# EAGLE board Solar_Points (EAGLE 9.6.2)
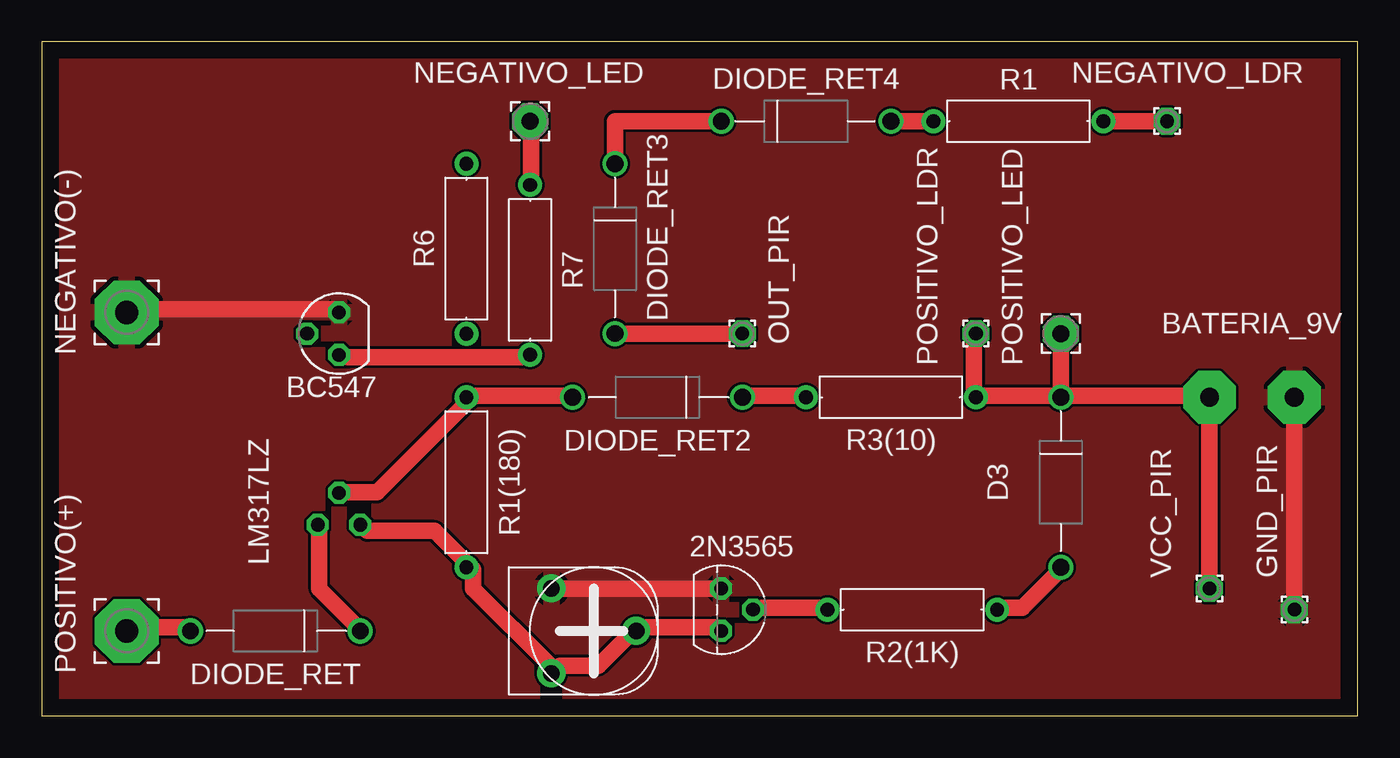
[diagram p0: board, top side]
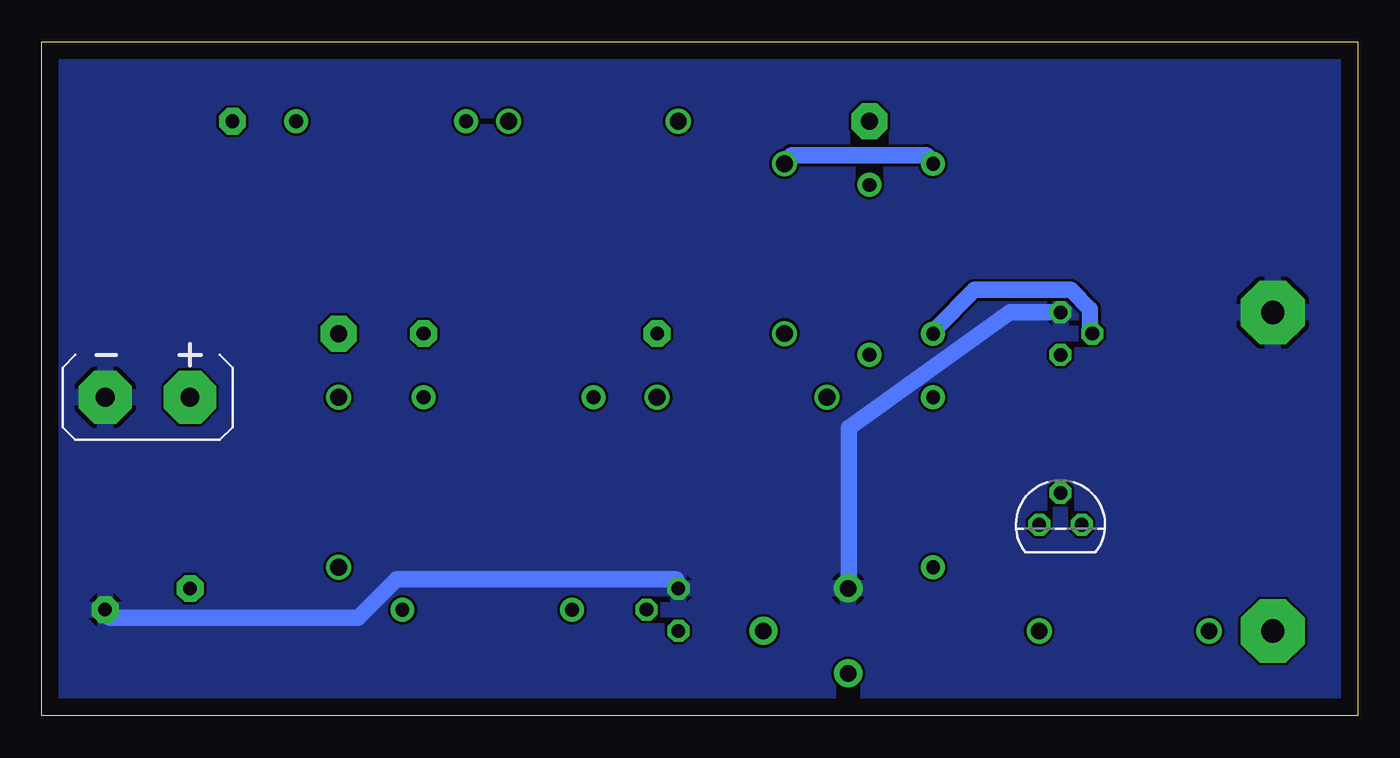
[diagram p1: board, bottom side, seen from below]

Size 78.72 x 40.31 mm. Coordinates in mm from the lower left corner, seen from the top.
Outline: 0,0 78.72,0 78.72,40.31 0,40.31 0,0
Copper layers (1*16): Top 0.035mm / dielectric 1.5mm / Bottom 0.035mm
Design rules "default *": minimum track width 1mm, minimum drill 0.35mm, track to track 6mil, track to pad 6mil, pad to pad 6mil, via to via 6mil, smd to smd 6mil, copper to edge 40mil, drill to drill 6mil, minimum pad ring 10mil, minimum via ring 8mil, stop-mask expansion 4mm, vias tented up to drill 0mil, thermal gap 10mil

## Footprints (pad centres in the part's own frame; a part is rotated, then mirrored left to right if it is on the bottom)
TO92 = drill 0.813 octagon: 1 1.27,0; 2 0,1.905; 3 -1.27,0
BATTERY-GENERIC = drill 1.118 pad 3.15 octagon: + 2.54,0; - -2.54,0
SOT54A = drill 0.813 octagon: B 0,1.905; C -1.27,0; E 1.27,0
DIODE-AXIAL = drill 1: 1 -5.08,0; 2 5.08,0
1,6/0,8 = drill 0.813 pad 1.6 octagon: 1 0,0
TO92' = drill 0.813 octagon: 1 -1.27,0; 2 0,1.905; 3 1.27,0
3,81/1,4 = drill 1.397 pad 3.81 octagon: 1 0,0
2,15/1,0 = drill 1.016 pad 2.159 octagon: 1 0,0
HA-06-SM065 = drill 1 pad 1.676: 1 -2.54,-2.54; 2 0,2.54; 3 2.54,-2.54
RESAD1016W63L850D250B = drill 0.83 pad 1.43: 1 -5.08,0; 2 5.08,0

## Placement (x,y rotation side)
2N3565  [TO92]  40.64,6.35 270 top
BATERIA_9V  [BATTERY-GENERIC]  72.39,19.05 0 bottom
BC547  [SOT54A]  17.78,22.86 90 top
D3  DIODE_ZENER  [DIODE-AXIAL]  60.96,13.97 90 top
DIODE_RET  [DIODE-AXIAL]  13.97,5.08 0 top
DIODE_RET2  [DIODE-AXIAL]  36.83,19.05 0 top
DIODE_RET3  [DIODE-AXIAL]  34.29,27.94 90 top
DIODE_RET4  [DIODE-AXIAL]  45.72,35.56 180 top
GND_PIR  [1,6/0,8]  74.93,6.35 0 top
LM317LZ  [TO92']  17.78,11.43 0 bottom
NEGATIVO(-)  [3,81/1,4]  5.08,24.13 0 top
NEGATIVO_LDR  [1,6/0,8]  67.31,35.56 0 top
NEGATIVO_LED  [2,15/1,0]  29.21,35.56 0 top
OUT_PIR  [1,6/0,8]  41.91,22.86 0 top
POSITIVO(+)  [3,81/1,4]  5.08,5.08 90 top
POSITIVO_LDR  [1,6/0,8]  55.88,22.86 0 top
POSITIVO_LED  [2,15/1,0]  60.96,22.86 0 top
POT(2K)  [HA-06-SM065]  33.02,5.08 270 top
R1  [RESAD1016W63L850D250B]  58.42,35.56 180 top
R1(180)  [RESAD1016W63L850D250B]  25.4,13.97 90 top
R2(1K)  [RESAD1016W63L850D250B]  52.07,6.35 180 top
R3(10)  [RESAD1016W63L850D250B]  50.8,19.05 180 top
R6  [RESAD1016W63L850D250B]  25.4,27.94 270 top
R7  [RESAD1016W63L850D250B]  29.21,26.67 270 top
VCC_PIR  [1,6/0,8]  69.85,7.62 0 top

## Library data of the parts
2N3565 = transistor-neu-to92
BATERIA_9V D3 DIODE_RET DIODE_RET2-DIODE_RET4 POT(2K) R1 R1(180) R2(1K) R3(10) R6 R7 = Tinkercad
BC547 = transistor-small-signal
GND_PIR NEGATIVO(-) NEGATIVO_LDR NEGATIVO_LED OUT_PIR POSITIVO(+) POSITIVO_LDR POSITIVO_LED VCC_PIR = wirepad
LM317LZ = linear

## Nets
GND: 2N3565.3 BATERIA_9V.- BC547.E GND_PIR.1 NEGATIVO(-).1 POT(2K).1
N$1: DIODE_RET.1 POSITIVO(+).1
N$2: DIODE_RET.2 LM317LZ.3
N$3: 2N3565.1 LM317LZ.1 POT(2K).2 POT(2K).3 R1(180).1
N$4: DIODE_RET2.1 LM317LZ.2 R1(180).2
N$5: DIODE_RET2.2 R3(10).2
N$6: BATERIA_9V.+ D3.2 POSITIVO_LDR.1 POSITIVO_LED.1 R3(10).1 VCC_PIR.1
N$7: D3.1 R2(1K).1
N$8: 2N3565.2 R2(1K).2
N$9: DIODE_RET3.1 OUT_PIR.1
N$10: NEGATIVO_LED.1 R7.1
N$11: NEGATIVO_LDR.1 R1.1
N$12: DIODE_RET3.2 DIODE_RET4.2 R6.1
N$13: BC547.B R6.2
N$14: BC547.C R7.2
N$15: DIODE_RET4.1 R1.2

## Tracks (layer width: path | path; a pad name or v marks a point on that pad's centre or on a via)
GND
  Top 1: BATERIA_9V.- GND_PIR.1 | 2N3565.3 40.22,7.61 31,7.61 POT(2K).1 | BC547.E 17.75,24.32 5.64,24.32 NEGATIVO(-).1
  Bottom 1: POT(2K).1 30.42,8.18 30.42,17.24 20.82,24.13 BC547.E | GND_PIR.1 74.67,5.88 59.81,5.88 57.5,8.18 40.79,8.18 2N3565.3
  pour Top: 0,39.37 78.74,39.37 78.74,0 0,0
  pour Bottom: 0,39.37 77.47,39.37 77.47,0 0,0
N$1
  Top 1: DIODE_RET.1 8.53,5.3 5.64,5.3 POSITIVO(+).1
N$2
  Top 1: LM317LZ.3 16.59,11.06 16.59,7.61 18.9,5.3 DIODE_RET.2
N$3
  Top 1: LM317LZ.1 19.47,11.06 23.51,11.06 25.23,9.34 R1(180).1 25.81,8.76 25.81,7.61 30.42,3 POT(2K).3 31,3 33.3,3 35.03,4.73 POT(2K).2 35.61,5.3 40.22,5.3 2N3565.1
N$4
  Top 1: LM317LZ.2 18.32,13.37 20.05,13.37 25.23,18.56 R1(180).2 25.81,19.13 31.57,19.13 DIODE_RET2.1
N$5
  Top 1: R3(10).2 45.4,19.13 41.95,19.13 DIODE_RET2.2
N$6
  Top 1: POSITIVO_LDR.1 55.77,22.59 55.77,19.13 R3(10).1 56.35,19.13 60.96,19.13 | 60.96,19.13 60.96,22.59 POSITIVO_LED.1 | 60.96,19.13 D3.2 61.54,19.13 69.48,19.13 BATERIA_9V.+ VCC_PIR.1
N$7
  Top 1: R2(1K).1 57.5,6.46 58.65,6.46 60.96,8.76 D3.1
N$8
  Top 1: 2N3565.2 43.1,6.46 46.55,6.46 R2(1K).2
N$9
  Top 1: OUT_PIR.1 DIODE_RET3.1
N$10
  Top 1: R7.1 29.27,31.81 29.27,35.27 NEGATIVO_LED.1
N$11
  Top 1: R1.1 NEGATIVO_LDR.1
N$12
  Top 1: DIODE_RET3.2 34.29,35.56 DIODE_RET4.2
  Bottom 1: R6.1 25.81,33.54 33.88,33.54 DIODE_RET3.2
N$13
  Bottom 1: BC547.B 16.02,23.17 16.02,24.32 17.17,25.47 22.93,25.47 25.23,23.17 R6.2
N$14
  Top 1: BC547.C 18.32,21.44 28.69,21.44 R7.2
N$15
  Top 1: DIODE_RET4.1 R1.2